# EAGLE board 2016-12-09_20-18-28 (EAGLE 6.4)
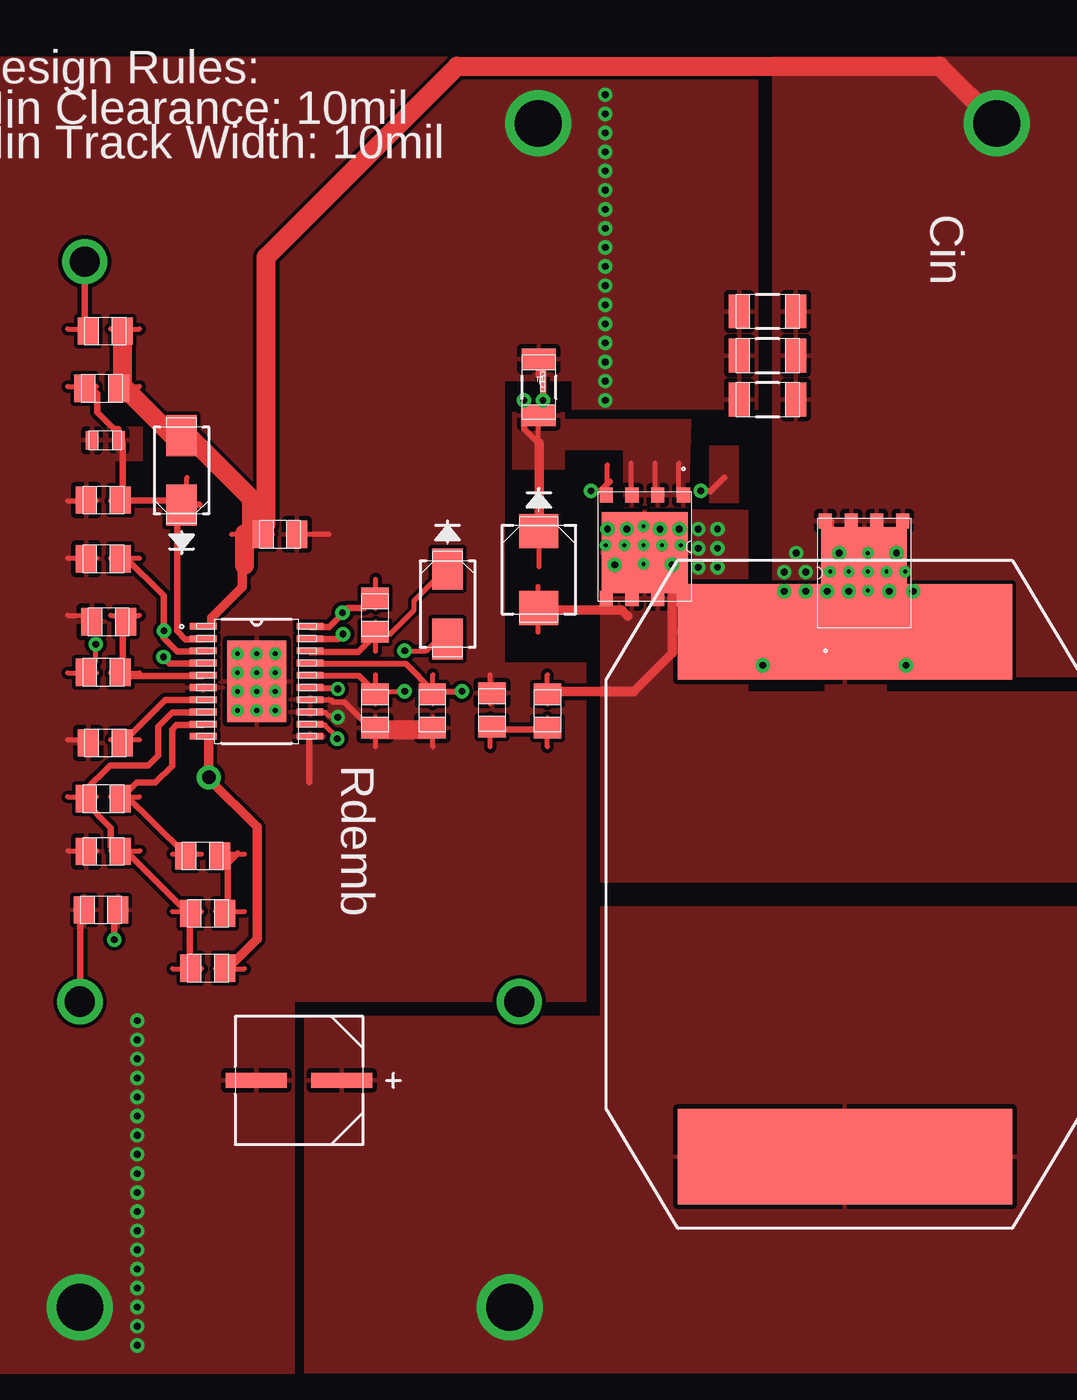
[diagram p0: board, top side]
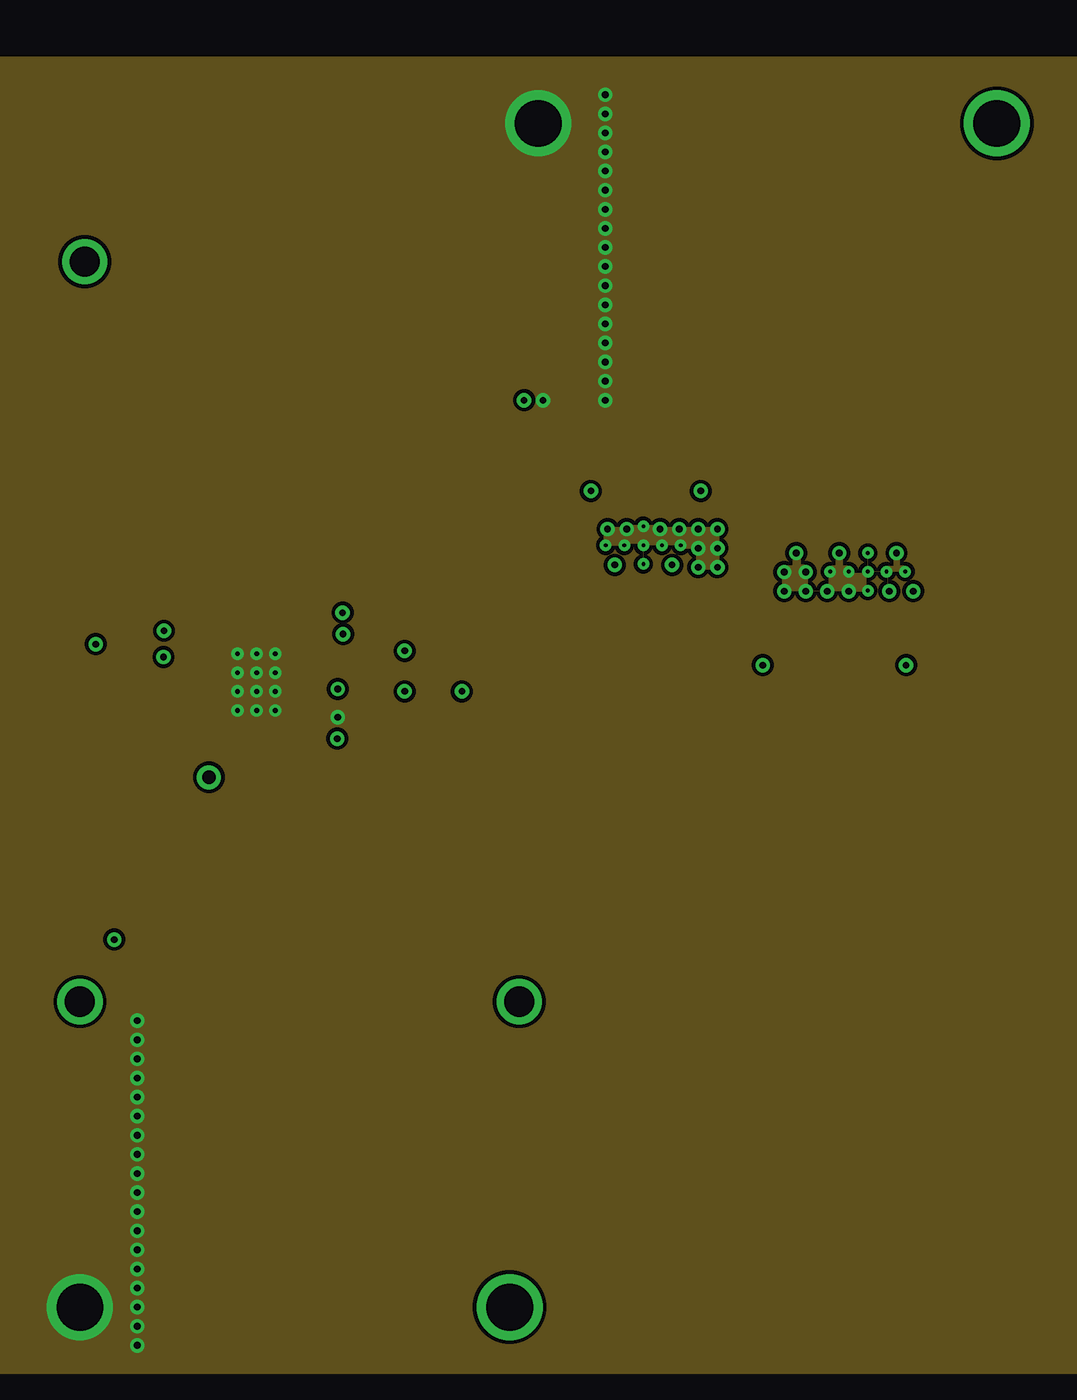
[diagram p1: board, inner layer INTERNAL1]
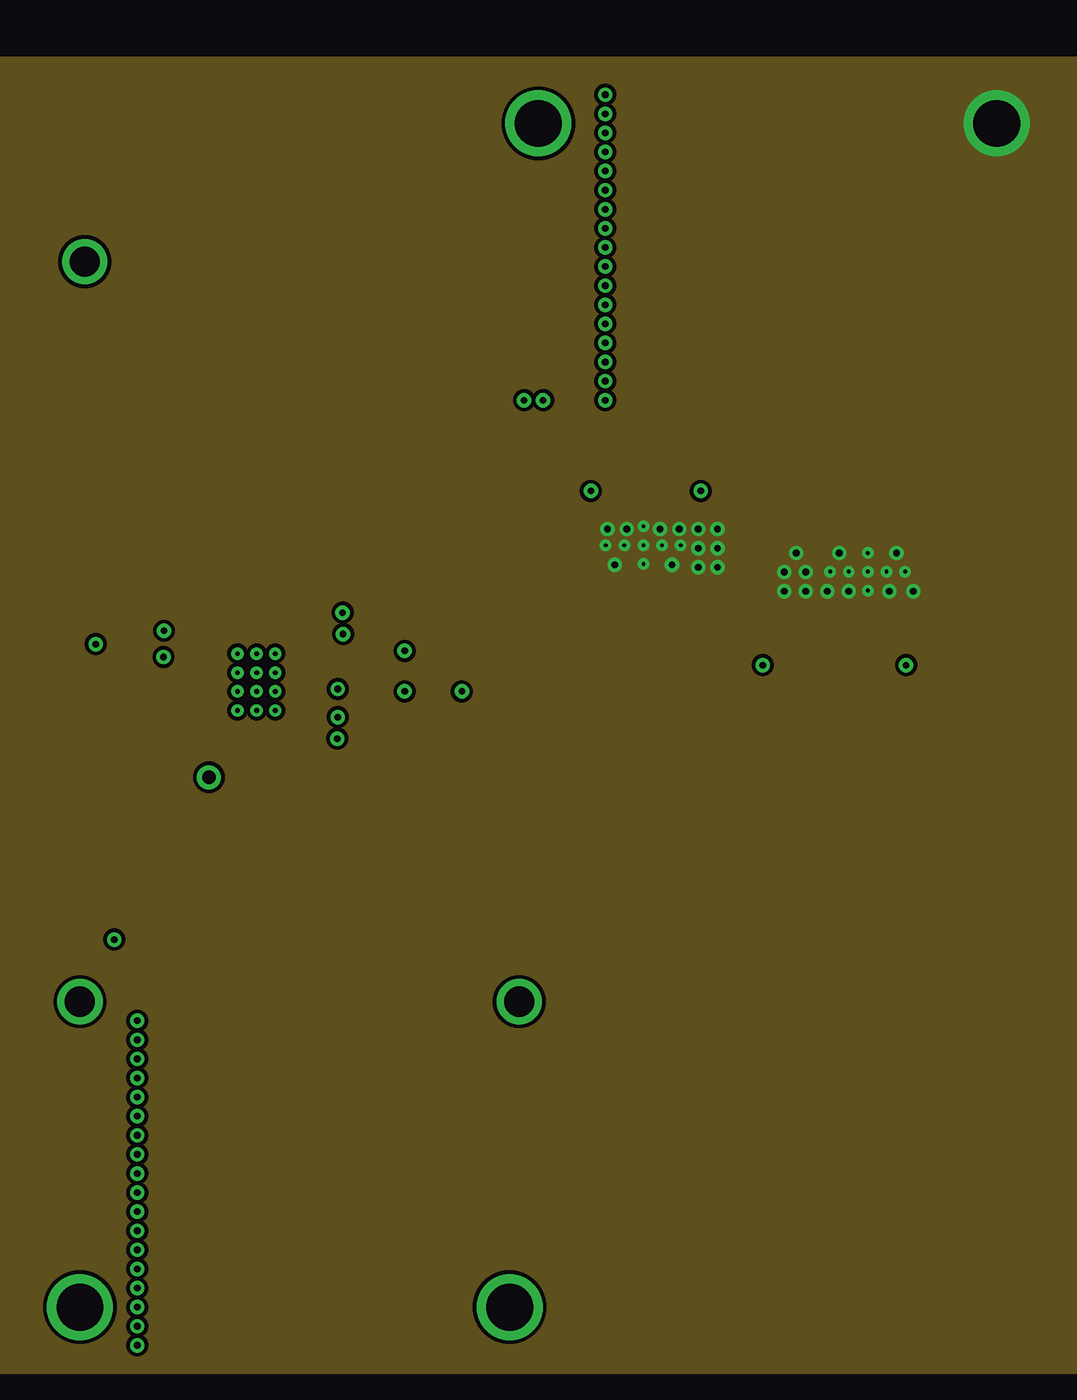
[diagram p2: board, inner layer INTERNAL2]
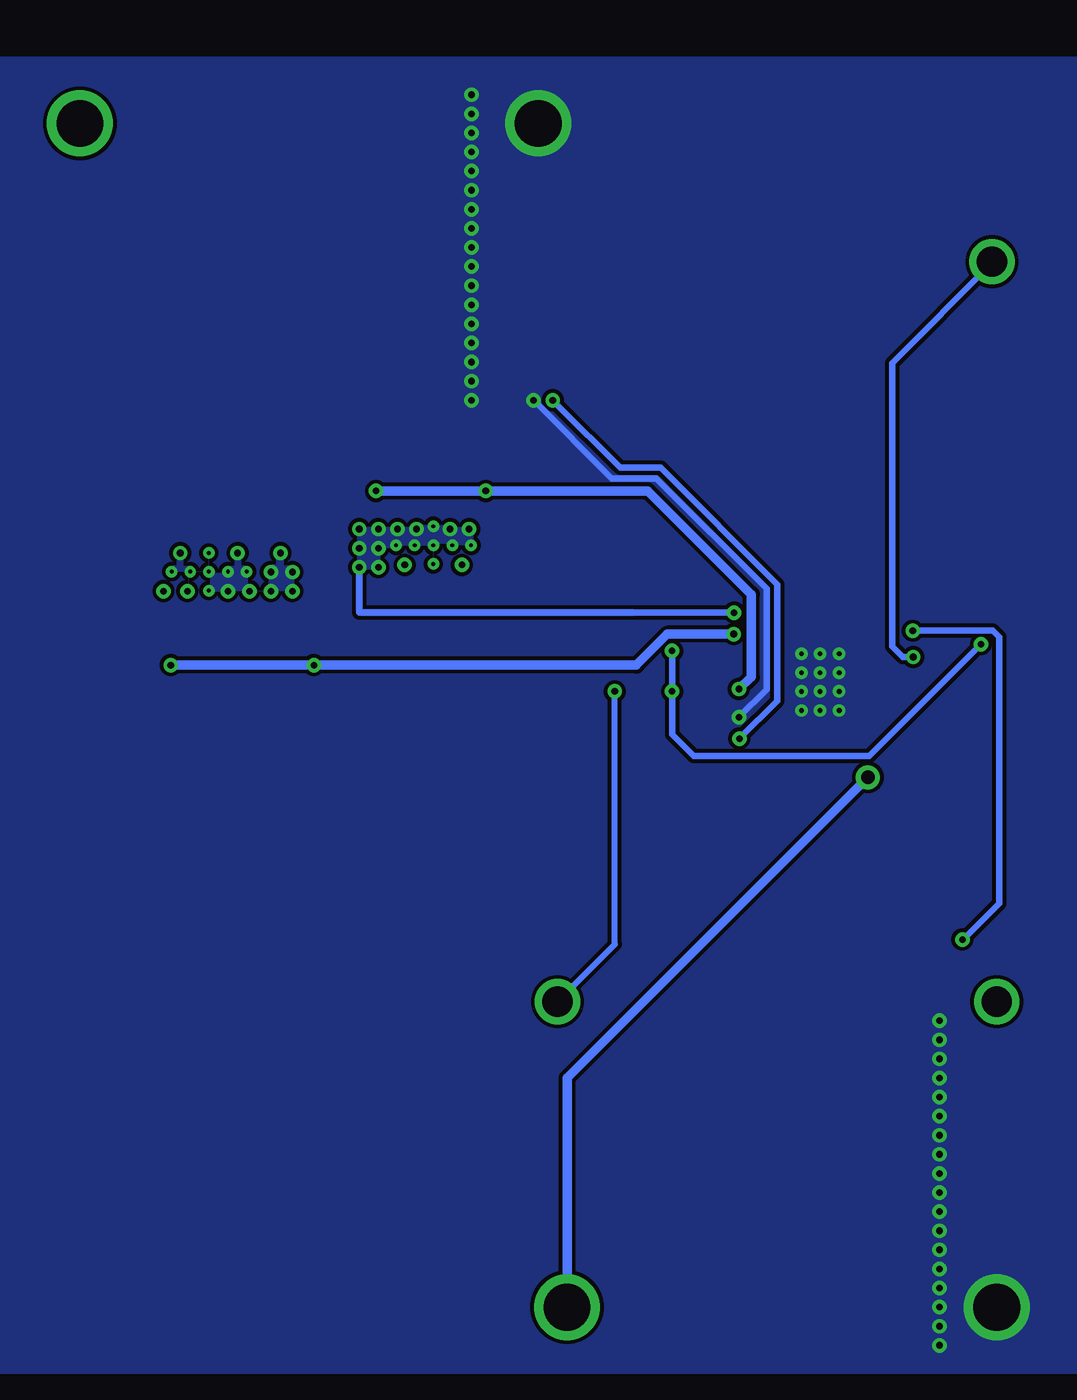
[diagram p3: board, bottom side, seen from below]

No outline drawn. Coordinates in mm, seen from the top.
Copper layers ((1*2)+(15*16)): TOP / INTERNAL1 / layer 15 / BOTTOM

## Footprints (pad centres in the part's own frame; a part is rotated, then mirrored left to right if it is on the bottom)
0603 = smd 0.66 x 0.965: 1 -0.699,0; 2 0.699,0
0805 = smd 1.118 x 1.448: 1 -0.902,0; 2 0.902,0
1206 = smd 1.118 x 1.803: 1 -1.499,0; 2 1.499,0
CAPSMT_62_C10 = smd 3.251 x 0.813: 1 -2.273,0; 2 2.273,0
SMA = smd 2.184 x 1.626: 1 -1.854,0; 2 1.854,0
SMB = smd 1.803 x 2.057: 1 -2.045,0; 2 2.045,0
TP-1502 = drill 0.813 round: 1 0,0
PM2110 = smd 5.08 x 17.78: 1 -13.97,0; 2 13.97,0
TRANS_NexFET_Q5A = smd 0.8 x 0.7: 1 -2.752,2.055; 2 -2.752,0.685; 3 -2.752,-0.685; 4 -2.752,-2.055; 5 2.752,-2.055; 6 2.752,-0.685; 7 2.752,0.685; 8 2.752,2.055 | smd 4.3 x 4.56: 9 0.3,0
NET_TIED = smd 0.965 x 0.254: 1 -0.381,0; 2 0.381,0
MXA20A = smd 1.422 x 0.356: 1 -2.845,2.925; 2 -2.845,2.275; 3 -2.845,1.625; 4 -2.845,0.975; 5 -2.845,0.325; 6 -2.845,-0.325; 7 -2.845,-0.975; 8 -2.845,-1.625; 9 -2.845,-2.275; 10 -2.845,-2.925; 11 2.845,-2.925; 12 2.845,-2.275; 13 2.845,-1.625; 14 2.845,-0.975; 15 2.845,-0.325; 16 2.845,0.325; 17 2.845,0.975; 18 2.845,1.625; 19 2.845,2.275; 20 2.845,2.925 | smd 3.15 x 4.343: 21 0,0

## Placement (x,y rotation side)
C1  [0603]  34.37,75.59 0 top
Cboot  [0805]  48.72,66.29 90 top
Ccomp  [0805]  39.55,53.47 0 top
Ccomp2  [0805]  34.26,56.52 180 top
Cin_1  [1206]  69.6,77.75 180 top
Cin_2  [1206]  69.6,80.09 180 top
Cin_3  [1206]  69.6,82.45 180 top
Cinx  [0805]  43.66,70.59 0 top
Cout  [CAPSMT_62_C10]  44.68,41.53 180 top
Cramp  [0805]  34.54,65.94 180 top
Csnub  [0805]  57.89,61.19 270 top
Css  [0805]  34.37,59.49 180 top
Csync  [0805]  34.14,50.6 180 top
Cvcc  [0805]  48.72,61.19 270 top
Cvccx  [0805]  51.77,61.19 270 top
D1  [SMA]  52.58,66.88 270 top
D2  [SMA]  38.43,73.99 90 top
D3  [SMB]  57.43,68.71 270 top
EN  [TP-1502]  33.25,85.06 180 top
GND  [TP-1502]  57.38,92.41 270 top
GND1  [TP-1502]  33.02,29.44 180 top
L1  [PM2110]  73.71,51.44 270 top
M1  [TRANS_NexFET_Q5A]  74.73,68.53 90 top
M2  [TRANS_NexFET_Q5A]  63.07,69.93 270 top
NT1  [NET_TIED]  57.63,78.71 270 top
Rcomp  [0805]  39.83,50.42 180 top
Renable  [0805]  34.37,81.41 180 top
Rfbb  [0805]  34.26,53.72 180 top
Rfbt  [0805]  39.83,47.5 180 top
Rramp  [0805]  34.26,63.25 180 top
Rsense  [1206]  57.43,78.41 90 top
Rsnub  [0805]  54.94,61.24 90 top
Rt  [0805]  34.26,69.29 180 top
Ruv1  [0805]  34.26,72.42 180 top
Ruv2  [0805]  34.19,78.36 180 top
Sync  [TP-1502]  32.92,45.49 180 top
U1  [MXA20A]  42.42,62.76 0 top
VCCX  [TP-1502]  56.36,45.67 0 top
VIN  [TP-1502]  81.76,92.41 180 top
VOUT  [TP-1502]  55.83,29.44 0 top

## Library data of the parts
C1 = ultra-librarian; RefDes: C1; Type: 06031A100FAT2A
Cboot = ultra-librarian; RefDes: Cboot; Type: EMK212B7105KG-T
Ccomp = ultra-librarian; RefDes: Ccomp; Type: CC0805KRX7R9BB682
Ccomp2 = ultra-librarian; RefDes: Ccomp2; Type: CL21C271JBANFNC
Cin_1-Cin_3 GND1 = ultra-librarian
Cinx = ultra-librarian; RefDes: Cinx; Type: C0805C104K5RACTU
Cout = ultra-librarian; RefDes: Cout; Type: 16SVPE180M
Cramp = ultra-librarian; RefDes: Cramp; Type: CC0805KRX7R9BB681
Csnub = ultra-librarian; RefDes: Csnub; Type: 0805YC224KAT2A
Css = ultra-librarian; RefDes: Css; Type: GRM216R71H103KA01D
Csync = ultra-librarian; RefDes: Csync; Type: C1608X7R1H104K
Cvcc = ultra-librarian; RefDes: Cvcc; Type: EMK212B7105KG-T
Cvccx = ultra-librarian; RefDes: Cvccx; Type: C2012X7R1E105K
D1 = ultra-librarian; RefDes: D1; Type: B230A-13-F
D2 = ultra-librarian; RefDes: D2; Type: 10MQ100NTRPBF
D3 = ultra-librarian; RefDes: D3; Type: MBRS2040LT3G
EN = ultra-librarian; RefDes: EN; Type: TP-1502
GND = ultra-librarian; RefDes: GND; Type: TP-1502
L1 = ultra-librarian; RefDes: L1; Type: PM2110-5R6M-RC
M1 = ultra-librarian; RefDes: M1; Type: CSD17310Q5A
M2 = ultra-librarian; RefDes: M2; Type: CSD18537NQ5A
NT1 = ultra-librarian; RefDes: NT1; Type: NET_TIED
Rcomp = ultra-librarian; RefDes: Rcomp; Type: ERJ-6ENF8061V
Renable = ultra-librarian; RefDes: Renable; Type: ERJ-6ENF1004V
Rfbb = ultra-librarian; RefDes: Rfbb; Type: ERJ-6ENF1101V
Rfbt = ultra-librarian; RefDes: Rfbt; Type: ERJ-6ENF9761V
Rramp = ultra-librarian; RefDes: Rramp; Type: ERJ-6ENF4753V
Rsense = ultra-librarian; RefDes: Rsense; Type: CSNL1206FT3L00
Rsnub = ultra-librarian; RefDes: Rsnub; Type: CRCW12061K00FKEA
Rt = ultra-librarian; RefDes: Rt; Type: ERJ-6ENF1272V
Ruv1 = ultra-librarian; RefDes: Ruv1; Type: ERJ-6ENF3161V
Ruv2 = ultra-librarian; RefDes: Ruv2; Type: ERJ-6ENF2612V
Sync = ultra-librarian; RefDes: Sync; Type: TP-1502
U1 = ultra-librarian; RefDes: U1; Type: LM25116MHX/NOPB
VCCX = ultra-librarian; RefDes: VCCX; Type: TP-1502
VIN = ultra-librarian; RefDes: VIN; Type: TP-1502
VOUT = ultra-librarian; RefDes: VOUT; Type: TP-1502

## Nets
0: C1.1 Cin_1.2 Cin_2.2 Cin_3.2 Cinx.2 Cout.2 Cramp.2 Css.2 Cvcc.2 Cvccx.2 GND1.1 GND.1 NT1.1 NT1.2 Rfbb.2 Rsense.2 Rsnub.2 Rt.2 Ruv1.2 U1.6 U1.11 U1.13 U1.14 U1.21
1: Cin_1.1 Cin_2.1 Cin_3.1 Cinx.1 D2.2 M1.5 M1.6 M1.7 M1.8 M1.9 Renable.1 Ruv2.1 U1.1 VIN.1
2: Css.1 U1.7
3: M2.4 U1.15
4: C1.2 D2.1 Ruv1.1 Ruv2.2 U1.2
5: Csync.1 Rt.1 U1.3
6: Cramp.1 Rramp.2 U1.5
7: EN.1 Renable.2 U1.4
9: Ccomp2.1 Ccomp.1 U1.9
10: Ccomp2.2 Rcomp.2 Rfbb.1 Rfbt.2 U1.8
11: Cout.1 L1.2 Rfbt.1 U1.10 VOUT.1
13: D3.1 M2.1 M2.2 M2.3 Rsense.1 U1.12
14: M1.4 U1.19
15: Cboot.1 D1.1 U1.18
16: Cvcc.1 D1.2 Rramp.1 U1.16
17: Cboot.2 Csnub.1 D3.2 L1.1 M1.1 M1.2 M1.3 M2.5 M2.6 M2.7 M2.8 M2.9 U1.20
21: Ccomp.2 Rcomp.1
32: Csnub.2 Rsnub.1
38: Cvccx.1 U1.17 VCCX.1
41: Csync.2 Sync.1

## Tracks (layer width: path | path; a pad name or v marks a point on that pad's centre or on a via)
0  (via drill 0.25 pad 0.48, 0.36 pad 0.64, 2.49 pad 3.48)
  TOP 0.254: 46.53,60.96 46.2,60.96 46.08,61.11 45.41,61.11 | 44.09,70.6 46.28,70.6 | 57.4,78.97 57.4,80.19 | 51.79,59.28 51.79,60.83 | 32.36,66.27 33.91,66.27 | 32.36,59.66 33.91,59.66 | 48.74,59.28 48.74,60.83 | 32.38,53.75 33.93,53.75 | 54.84,61.57 54.84,63.12 | 32.36,69.32 33.91,69.32 | 32.36,72.36 33.91,72.36
  TOP 0.305: 45.54,61.77 46.38,61.77 46.48,61.67 47.07,61.67 48.54,60.2
  TOP 0.356: v57.66,77.72 57.66,79.6 | 45.21,57.4 45.21,59.74
  TOP 1.016: 48.54,60.2 51.56,60.2
  BOTTOM 0.356: v46.74,60.86 45.26,62.33 45.26,67.69 51.13,73.56 53.49,73.56 v57.66,77.72
  other vias: 41.4,63.22 41.4,62.23 41.4,61.21 43.41,61.21 42.42,61.21 43.41,62.23 42.42,62.23 43.41,63.22 42.42,63.22 43.41,64.24 42.42,64.24 41.4,64.24 36.07,27.43 36.07,28.45 36.07,29.46 36.07,30.48 36.07,31.5 36.07,32.51 36.07,33.53 36.07,34.54 36.07,35.56 36.07,36.58 36.07,37.59 36.07,38.61 36.07,39.62 36.07,40.64 36.07,41.66 36.07,42.67 36.07,43.69 36.07,44.7 60.96,93.98 60.96,92.96 60.96,91.95 60.96,90.93 60.96,89.92 60.96,88.9 60.96,87.88 60.96,86.87 60.96,85.85 60.96,84.84 60.96,83.82 60.96,82.8 60.96,81.79 60.96,80.77 60.96,79.76 60.96,78.74 60.96,77.72 57.4,92.46 33.02,29.46
  pour TOP (rank 6): 57.78,78.89 57.78,78.59 57.53,78.59 57.53,78.89
  pour TOP (rank 6): 32.18,74.5 32.18,76.33 34.09,76.33 34.09,74.5
  pour TOP (rank 6): 57.53,78.36 57.53,78.61 57.78,78.61 57.78,78.36
  pour TOP (rank 6): 57.53,78.87 57.53,79.12 57.78,79.12 57.78,78.87
  pour TOP: 25.91,96.01 69.09,96.01 69.09,77.22 59.18,77.22 59.18,77.98 59.18,78.74 55.63,78.74 55.63,63.75 59.94,63.75 59.94,45.72 44.45,45.72 44.45,25.91 25.91,25.91
  pour BOTTOM: 25.91,25.91 25.91,96.01 86.87,96.01 86.87,25.91
  pour INTERNAL1: 25.91,25.91 86.87,25.91 86.87,96.01 25.91,96.01
1  (via drill 0.2 pad 0.48, 0.36 pad 0.64, 2.49 pad 3.48)
  TOP 0.254: 41.07,70.6 43.26,70.6 | 38.71,75.08 38.71,76.71 | 34.65,81.51 36.2,81.51 | 34.65,78.46 36.2,78.46 | 76.82,70.64 76.82,71.27 | 75.55,70.64 75.55,71.27 | 74.28,70.64 74.28,71.27 | 73.01,70.64 73.01,71.27 | 74.92,66.9 74.92,70.28
  TOP 0.508: 35.33,78.56 35.38,78.51 35.38,78.18 | 40.03,65.79 40.03,66.17 41.66,67.79 41.66,68.81 | 37.64,75.89 38.73,75.89 38.86,75.89
  TOP 1.016: v81.79,92.46 78.74,95.5 53.09,95.5 42.93,85.34 42.93,71.12 42.42,70.61 41.78,70.61 41.78,68.94 | 35.31,81.53 35.31,78.49 37.87,75.89 38.73,75.89 42.16,72.47 42.16,70.61
  other vias: 72.92,68.61 76.91,68.61 75.92,68.61 74.93,67.59 73.91,68.61 74.93,69.6 74.93,68.61 76.07,67.56 77.34,67.56 73.91,67.56 72.77,67.56 71.63,67.56 70.48,67.56 70.48,68.58 71.63,68.58 73.41,69.6 76.45,69.6 71.12,69.6
  pour TOP: 70.08,66.62 70.08,75.01 77.7,75.01 77.7,66.62
  pour TOP (rank 4): 69.85,96.01 69.85,66.8 78.49,66.8 78.49,62.99 86.87,62.99 86.87,96.01
  pour BOTTOM (rank 5): 86.87,72.26 69.85,72.26 69.85,64.26 86.87,64.26
  pour INTERNAL2 (rank 3): 86.87,72.26 69.85,72.26 69.85,64.26 86.87,64.26
  pour INTERNAL2 (rank 3): 25.91,25.91 86.87,25.91 86.87,96.01 25.91,96.01
  pour INTERNAL1 (rank 4): 86.87,72.26 69.85,72.26 69.85,64.26 86.87,64.26
2
  TOP 0.254: 34.65,59.66 36.2,59.66
  TOP 0.356: 39.7,61.77 37.57,61.77 35.48,59.69 35.31,59.69
3  (via drill 0.36 pad 0.64)
  TOP 0.254: 61.07,72.62 61.07,74.3
  TOP 0.33: 45.26,62.41 46.66,62.41
  TOP 0.356: v66.04,72.9 66.57,72.9 67.28,73.61 | v60.2,72.9 60.71,72.9 61.21,73.41
  BOTTOM 0.356: 46.71,62.36 v46.74,62.36
  BOTTOM 0.508: v46.74,62.36 46.08,62.99 46.08,67.39 51.59,72.9 v66.04,72.9
  pour TOP (rank 3): 66.5,72.26 66.5,75.31 68.07,75.31 68.07,72.26
4
  TOP 0.254: 38.71,71.42 38.71,73.61 | 34.65,72.36 36.2,72.36 | 32.36,78.46 33.91,78.46
  TOP 0.356: 39.55,65 38.61,65 38.2,65.43 38.2,71.73 38.86,72.39 38.86,72.64 | 35.31,72.39 35.31,75.44 | 35.31,72.16 35.31,72.39 | 33.27,78.49 33.53,78.49 33.93,78.08 33.93,77.09 34.85,76.17 35.05,76.17 | 39.37,72.16 38.35,72.16 38.12,72.39 35.31,72.39
  pour TOP: 34.47,74.5 34.47,76.33 36.37,76.33 36.37,74.5
5  (via drill 0.36 pad 0.64)
  TOP 0.254: 34.65,69.32 36.2,69.32
  TOP 0.356: 38.2,64.36 37.49,65.08 37.49,67.33 35.38,69.42 | 38.23,64.36 39.85,64.36 | v34.85,49.02 34.85,50.09 35.31,50.55
  BOTTOM 0.356: 32.89,65.13 33.22,65.46 37.52,65.46 | 32.89,65.1 32.89,50.95 34.8,49.02
  other vias: 37.49,65.46
  pour TOP: 34.47,49.61 34.47,51.44 36.37,51.44 36.37,49.61
6
  TOP 0.254: 34.65,63.22 36.2,63.22 | 34.65,66.27 36.2,66.27
  TOP 0.356: 35.31,66.29 35.31,63.04 39.55,63.04
7  (via drill 0.36 pad 0.64, 1.6 pad 2.21)
  TOP 0.254: 32.36,81.51 33.91,81.51
  TOP 0.356: 33.27,81.53 33.27,84.96 | 39.55,63.7 37.77,63.7 37.47,64.03
  BOTTOM 0.356: 33.27,85.01 38.58,79.7 38.58,64.62 38.02,64.06 37.44,64.06
  other vias: 37.47,64.06 33.27,85.09
9
  TOP 0.254: 34.65,56.62 36.2,56.62 | 37.95,53.57 39.5,53.57
  TOP 0.356: 35.41,56.74 38.58,53.59 38.86,53.59 | 39.55,60.45 38.15,60.45 37.92,60.2 37.92,58.27 37.03,57.38 36.04,57.38 35.31,56.64
10
  TOP 0.254: 32.36,56.62 33.91,56.62 | 37.95,50.52 39.5,50.52 | 34.67,53.75 36.22,53.75 | 37.95,47.47 39.5,47.47
  TOP 0.356: 38.86,50.34 38.86,50.55 | 38.86,47.57 38.86,50.34 | 38.86,50.34 35.23,53.98 34.67,53.98 34.67,54.97 33.27,56.36 33.27,56.64 33.27,56.95 34.62,58.29 36.65,58.29 37.19,58.83 37.19,60.38 37.92,61.11 39.73,61.11 | 38.86,50.34 38.91,50.29
11  (via drill 0.71 pad 1.27, 2.49 pad 3.48)
  TOP 0.254: 40.23,47.47 41.78,47.47
  TOP 0.508: 39.88,59.69 v39.88,57.66 39.88,57.58 42.44,55.02 42.44,49.05 40.89,47.5 40.89,48.01
  BOTTOM 0.508: v39.88,57.66 55.88,41.66 55.88,29.21
  other vias: 55.88,29.46 55.88,29.46
  pour TOP (rank 4): 44.96,25.96 44.96,44.96 60.71,44.96 60.71,50.8 86.36,50.8 86.87,50.8 86.87,25.91
13  (via drill 0.36 pad 0.64)
  TOP 0.254: v46.71,59.72 46.71,59.82 46.05,60.45 45.26,60.45 | 57.4,74.17 57.4,76.86 | 57.44,68.86 57.44,72.31 | 62.34,72.57 62.34,74.37 | 63.61,72.57 63.61,74.37 | 64.88,72.57 64.88,74.37
  TOP 0.356: v56.64,77.72 56.64,76.2 57.4,75.44
  TOP 0.508: 57.45,70.59 57.45,75.44
  BOTTOM 0.356: v46.71,59.72 44.7,61.72 44.7,67.92 50.9,74.14 53.06,74.14 56.41,77.5 | v56.64,77.72 56.64,77.75
  pour TOP (rank 2): 61.93,72.26 61.93,75.31 63.5,75.31 63.5,72.26
  pour TOP (rank 5): 56.01,77.09 58.8,77.09 58.8,76.71 65.53,76.71 65.41,72.01 61.98,72.01 61.98,75.06 58.8,75.06 58.8,74.04 56.01,74.04
14  (via drill 0.36 pad 0.64)
  TOP 0.356: 45.57,65.02 46.76,65.02 v47.02,65.28 | 47.02,65.18 47.02,65.23
  BOTTOM 0.508: 76.96,63.63 69.34,63.63 52.2,63.63 50.55,65.28 v47.02,65.28
15
  TOP 0.254: 52.55,68.81 50.8,67.06 50.8,66.55 49.53,65.28 48.77,65.28 | 48.74,64.36 48.74,65.91
  TOP 0.356: 45.26,64.34 47.83,64.34 48.77,65.28
16  (via drill 0.36 pad 0.64)
  TOP 0.254: v50.29,62.23 48.77,62.23 48.69,62.23 | v33.86,64.75 33.86,63.83 33.27,63.25 | 50.42,64.39 v50.29,64.39 51.44,64.39 52.58,65.53 | 32.36,63.22 33.91,63.22 | 48.74,61.57 48.74,63.12
  TOP 0.33: 45.26,63.07 47.85,63.07 48.69,62.23
  BOTTOM 0.254: v50.29,64.39 50.29,64.52
  BOTTOM 0.356: 33.83,64.77 v33.86,64.75 39.8,58.8 49.15,58.8 50.29,59.94 v50.29,62.23 v50.29,64.39
17  (via drill 0.2 pad 0.48, 0.36 pad 0.64)
  TOP 0.254: 48.74,66.65 48.74,68.2 | 57.89,61.57 57.89,63.12 | 57.39,65.38 57.39,67.82 | 76.82,64.24 76.82,66.04 | 75.55,64.24 75.55,66.04 | 74.28,64.24 74.28,66.04 | 73.01,64.24 73.01,66.04 | 61.07,67.31 61.07,67.94 | 62.34,67.31 62.34,67.94 | 63.61,67.31 63.61,67.94 | 64.88,67.31 64.88,67.94 | 62.98,68.35 62.98,71.68
  TOP 0.356: 47.24,66.67 48.13,66.67 48.77,67.31 | 45.26,65.66 46.28,65.66 47.02,66.4 | 76.86,65.68 76.86,65.71 | v69.34,63.63 70.48,63.63 | v76.96,63.63 76.96,65.58
  TOP 0.508: 57.91,62.23 62.48,62.23 64.52,64.26 64.52,67.54 | 57.4,66.8 57.66,66.55 61.85,66.55 62.15,66.24
  BOTTOM 0.356: v66.93,68.83 66.93,66.42 v46.99,66.42
  other vias: 61.09,70.87 62.1,70.87 63.88,70.87 65.91,70.87 64.9,70.87 66.93,70.87 66.93,69.85 65.91,69.85 64.52,68.96 61.47,68.96 65.91,68.83 64.97,70 60.99,70 61.98,70 62.99,71.02 63.98,70 62.99,69.01 62.99,70
  pour TOP (rank 2): 74.37,63.22 74.37,66.27 75.95,66.27 75.95,63.22
  pour TOP (rank 2): 69.8,63.22 69.8,66.27 71.37,66.27 71.37,63.22
  pour TOP (rank 2): 60.71,63.53 60.71,71.91 68.33,71.91 68.33,63.53
  pour TOP (rank 5): 60.71,71.88 68.58,71.88 68.58,62.23 72.64,62.23 72.64,66.29 75.95,66.29 75.95,62.23 86.87,62.23 86.87,52.07 60.71,52.07
  pour BOTTOM (rank 5): 69.6,72.26 52.32,72.26 52.32,64.26 69.6,64.26
  pour INTERNAL2 (rank 3): 69.6,72.26 52.32,72.26 52.32,64.26 69.6,64.26
  pour INTERNAL1 (rank 4): 69.6,64.26 69.6,72.26 52.32,72.26 52.32,64.26
21
  TOP 0.254: 40.23,50.52 41.78,50.52 | 40.23,53.57 41.78,53.57
  TOP 0.356: 40.89,50.22 40.89,50.55 40.89,53.09 41.4,53.59
32
  TOP 0.254: 57.89,59.28 57.89,60.83 | 54.84,59.28 54.84,60.83
  TOP 0.356: 54.86,60.2 57.91,60.2
38  (via drill 0.36 pad 0.64, 1.6 pad 2.21)
  TOP 0.254: 51.79,61.57 51.79,63.12
  TOP 0.33: v53.34,62.23 51.82,62.23 50.34,63.7 45.41,63.7
  BOTTOM 0.33: v56.39,45.72 53.34,48.77 v53.34,62.23
41  (via drill 1.6 pad 2.21)
  TOP 0.356: 33.05,45.72 33.05,50.42 33.27,50.65
  other vias: 33.02,45.72
  pour TOP: 32.18,49.61 32.18,51.44 34.09,51.44 34.09,49.61

## Text on the board
ASSYNOTES: Design Rules: | Min Clearance: 10mil | Min Track Width: 10mil | Cin | Rdemb